# EAGLE board CT_schematic (EAGLE 7.6.0)

Size 100 x 80 mm. Coordinates in mm from the lower left corner, seen from the top.
Outline: 0,0 100,0 100,80 0,80 0,0
Copper layers (1*16): Top 0.035mm / dielectric 1.5mm / Bottom 0.035mm
Design rules "default": minimum track width 10mil, minimum drill 24mil, track to track 8mil, track to pad 8mil, pad to pad 8mil, via to via 8mil, smd to smd 8mil, copper to edge 40mil, drill to drill 8mil, minimum pad ring 10mil, minimum via ring 8mil, stop-mask expansion 4mil, vias tented up to drill 0mil, thermal gap 10mil

## Footprints (pad centres in the part's own frame; a part is rotated, then mirrored left to right if it is on the bottom)
C0603 = smd 0.8 x 0.8: 1 -0.762,0; 2 0.762,0
C0402 = smd 0.5 x 0.5: 1 -0.508,0; 2 0.508,0
R0603 = smd 0.8 x 0.8: 1 -0.762,0; 2 0.762,0
C1206 = smd 1.3 x 1.6: 1 -1.524,0; 2 1.524,0
C0805 = smd 1.2 x 1.3: 1 -1.016,0; 2 1.016,0
C1210 = smd 1.2 x 2.5: 1 -1.524,0; 2 1.524,0
EXV-9H = smd 3.505 x 1.676: 1 -2.857,0; 2 2.857,0
L0603 = smd 0.8 x 0.8: 1 -0.762,0; 2 0.762,0
PJ-037B_PACKAGE = drill 3.7 square: 1 12,0 | drill 3.2 square: 2 6,0
LQFP64 = smd 0.3 x 1.2: 1 -3.75,-5.75; 2 -3.25,-5.75; 3 -2.75,-5.75; 4 -2.25,-5.75; 5 -1.75,-5.75; 6 -1.25,-5.75; 7 -0.75,-5.75; 8 -0.25,-5.75; 9 0.25,-5.75; 10 0.75,-5.75; 11 1.25,-5.75; 12 1.75,-5.75; 13 2.25,-5.75; 14 2.75,-5.75; 15 3.25,-5.75; 16 3.75,-5.75; 33 3.75,5.75; 34 3.25,5.75; 35 2.75,5.75; 36 2.25,5.75; 37 1.75,5.75; 38 1.25,5.75; 39 0.75,5.75; 40 0.25,5.75; 41 -0.25,5.75; 42 -0.75,5.75; 43 -1.25,5.75; 44 -1.75,5.75; 45 -2.25,5.75; 46 -2.75,5.75; 47 -3.25,5.75; 48 -3.75,5.75 | smd 1.2 x 0.3: 17 5.75,-3.75; 18 5.75,-3.25; 19 5.75,-2.75; 20 5.75,-2.25; 21 5.75,-1.75; 22 5.75,-1.25; 23 5.75,-0.75; 24 5.75,-0.25; 25 5.75,0.25; 26 5.75,0.75; 27 5.75,1.25; 28 5.75,1.75; 29 5.75,2.25; 30 5.75,2.75; 31 5.75,3.25; 32 5.75,3.75; 49 -5.75,3.75; 50 -5.75,3.25; 51 -5.75,2.75; 52 -5.75,2.25; 53 -5.75,1.75; 54 -5.75,1.25; 55 -5.75,0.75; 56 -5.75,0.25; 57 -5.75,-0.25; 58 -5.75,-0.75; 59 -5.75,-1.25; 60 -5.75,-1.75; 61 -5.75,-2.25; 62 -5.75,-2.75; 63 -5.75,-3.25; 64 -5.75,-3.75
TDFN-8/6MM = smd 0.3 x 0.75: 1 0,0; 2 0.5,0; 3 1,0; 4 1.5,0; 5 1.5,3; 6 1,3; 7 0.5,3; 8 0,3
SOIC-8 = smd 1.6 x 0.6: 1 -2.7,1.905 | smd 1.55 x 0.6: 2 -2.7,0.635; 3 -2.7,-0.635; 4 -2.7,-1.905; 5 2.7,-1.905; 6 2.7,-0.635; 7 2.7,0.635; 8 2.7,1.905
182-009-MALE = drill 1.194 pad 1.524 octagon: 1 -5.537,10.923; 2 -2.769,10.923; 3 0,10.923; 4 2.769,10.923; 5 5.537,10.923; 6 -4.153,8.08; 7 -1.384,8.08; 8 1.384,8.08; 9 4.153,8.08 | hole 3.048: -12.446,9.501; 12.446,9.501
QFN-32 = smd 0.6 x 0.3: 1 -2.3,1.75; 2 -2.3,1.25; 3 -2.3,0.75; 4 -2.3,0.25; 5 -2.3,-0.25; 6 -2.3,-0.75; 7 -2.3,-1.25; 8 -2.3,-1.75; 17 2.3,-1.75; 18 2.3,-1.25; 19 2.3,-0.75; 20 2.3,-0.25; 21 2.3,0.25; 22 2.3,0.75; 23 2.3,1.25; 24 2.3,1.75 | smd 0.3 x 0.6: 9 -1.75,-2.3; 10 -1.25,-2.3; 11 -0.75,-2.3; 12 -0.25,-2.3; 13 0.25,-2.3; 14 0.75,-2.3; 15 1.25,-2.3; 16 1.75,-2.3; 25 1.75,2.3; 26 1.25,2.3; 27 0.75,2.3; 28 0.25,2.3; 29 -0.25,2.3; 30 -0.75,2.3; 31 -1.25,2.3; 32 -1.75,2.3 | smd 3.2 x 3.2: EXP 0,0
SJ-43515TS-SMT-TR = smd 2.2 x 3: 1 0.6,-7.4; 4 3.4,-7.4 | smd 3 x 3: 2 12.8,-7.4; 5 17,-3 | smd 2 x 3: 3 5.3,0; 6 2.5,0 | drill 1.8: P$7 4.5,-3.69; P$8 11.54,-3.69
WM-64PC = drill 0.6 pad 1: 1 -1,0.95; 2 -1,-0.95
RHB32_3P45X3P45 = smd 0.85 x 0.28: 1 -2.475,1.75; 2 -2.475,1.25; 3 -2.475,0.75; 4 -2.475,0.25; 5 -2.475,-0.25; 6 -2.475,-0.75; 7 -2.475,-1.25; 8 -2.475,-1.75; 17 2.475,-1.75; 18 2.475,-1.25; 19 2.475,-0.75; 20 2.475,-0.25; 21 2.475,0.25; 22 2.475,0.75; 23 2.475,1.25; 24 2.475,1.75 | smd 0.28 x 0.85: 9 -1.75,-2.475; 10 -1.25,-2.475; 11 -0.75,-2.475; 12 -0.25,-2.475; 13 0.25,-2.475; 14 0.75,-2.475; 15 1.25,-2.475; 16 1.75,-2.475; 25 1.75,2.475; 26 1.25,2.475; 27 0.75,2.475; 28 0.25,2.475; 29 -0.25,2.475; 30 -0.75,2.475; 31 -1.25,2.475; 32 -1.75,2.475 | smd 3.45 x 3.45: 33 0,0
USB-A-H = drill 0.914: 1 2.718,3.493; 2 2.718,1.003; 3 2.718,-1.003; 4 2.718,-3.493 | drill 2.311: 5 0,-6.566; 6 0,6.566
SOT143B = smd 1 x 0.7: 1 -0.75,-1 | smd 0.6 x 0.7: 2 0.95,-1; 3 0.95,1; 4 -0.95,1
SOT-23-6 = smd 1.1 x 0.6: 1 -1.4,0.95; 2 -1.4,0; 3 -1.4,-0.95; 4 1.4,-0.95; 5 1.4,0; 6 1.4,0.95
ABS07-32.768KHZ-7-T = smd 1.1 x 2.4: 1 -2.5,0; 2 0,0
ABLS-25.000MHZ-B2F-T = smd 5.6 x 2.8: 1 -3.81,0; 2 5.69,0
ASFL1 = smd 1.7 x 1.5: 1 -1.27,-1.1; 2 1.27,-1.1; 3 1.27,1.1; 4 -1.27,1.1
WSON-8 = smd 0.3 x 0.6: 1 -0.75,0; 2 0.05,0; 3 0.85,0; 4 1.65,0; 5 1.65,3.8; 6 0.85,3.8; 7 0.05,3.8; 8 -0.75,3.8 | smd 3 x 2.6: PAD 0.45,1.9
SON-6 = smd 0.55 x 0.3: 1 -0.355,0.5 | smd 0.52 x 0.3: 2 -0.37,0; 3 -0.37,-0.5; 4 0.37,-0.5; 5 0.37,0; 6 0.37,0.5
SW_4-1437565-2 = smd 1.4 x 2.1: 1 -2.23,4.55; 2 -2.23,-4.55; 3 2.23,4.55; 4 2.23,-4.55
LGM67K-G1J2-24-Z = smd 0.8 x 1.4: A -2,0; C 0,0
NC7SZ125M5X = smd 1.3 x 0.7: 1 -1.3,0.95; 2 -1.3,0; 3 -1.3,-0.95; 4 1.3,-0.95; 5 1.3,0.95

## Placement (x,y rotation side)
C1  1e-06  [C0603]  -19.05,93.98 0 top  (outside the outline)
C2  1e-07  [C0603]  -22.86,93.98 0 top  (outside the outline)
C3  1e-07  [C0603]  -26.67,93.98 0 top  (outside the outline)
C4  1e-07  [C0603]  -30.48,93.98 0 top  (outside the outline)
C5  1e-07  [C0603]  -34.29,93.98 0 top  (outside the outline)
C6  1e-07  [C0603]  -38.1,93.98 0 top  (outside the outline)
C7  4.7e-06  [C0603]  -80.01,88.9 0 top  (outside the outline)
C8  2.2e-06  [C0603]  -83.82,88.9 0 top  (outside the outline)
C9  2.2e-06  [C0603]  -87.63,88.9 0 top  (outside the outline)
C10  1e-08  [C0603]  -41.91,93.98 0 top  (outside the outline)
C11  1e-06  [C0603]  -45.72,93.98 0 top  (outside the outline)
C12  1e-11  [C0402]  -64.77,99.06 0 top  (outside the outline)
C13  1e-11  [C0402]  -68.58,99.06 0 top  (outside the outline)
C14  1e-11  [C0402]  -72.39,99.06 0 top  (outside the outline)
C15  1e-11  [C0402]  -76.2,99.06 0 top  (outside the outline)
C16  1e-08  [C0402]  -80.01,99.06 0 top  (outside the outline)
C17  1e-06  [C0603]  -49.53,93.98 0 top  (outside the outline)
C18  1e-06  [C0603]  -53.34,93.98 0 top  (outside the outline)
C19  1e-06  [C0603]  -57.15,93.98 0 top  (outside the outline)
C20  1e-06  [C0603]  -60.96,93.98 0 top  (outside the outline)
C21  1e-06  [C0603]  -64.77,93.98 0 top  (outside the outline)
C22  1e-06  [C0603]  -68.58,93.98 0 top  (outside the outline)
C23  1e-06  [C0603]  -72.39,93.98 0 top  (outside the outline)
C24  1e-06  [C0603]  -76.2,93.98 0 top  (outside the outline)
C25  1e-06  [C0603]  -80.01,93.98 0 top  (outside the outline)
C26  1e-07  [C0402]  -83.82,99.06 0 top  (outside the outline)
C27  1e-07  [C0402]  -87.63,99.06 0 top  (outside the outline)
C28  1e-07  [C0402]  -91.44,99.06 0 top  (outside the outline)
C29  1e-07  [C0402]  -15.24,104.14 0 top  (outside the outline)
C30  1e-06  [C0603]  -83.82,93.98 0 top  (outside the outline)
C31  1e-07  [C0402]  -19.05,104.14 0 top  (outside the outline)
C32  2.2e-06  [C0603]  -91.44,88.9 0 top  (outside the outline)
C33  1e-07  [C0402]  -22.86,104.14 0 top  (outside the outline)
C34  1e-07  [C0402]  -26.67,104.14 0 top  (outside the outline)
C35  2.2e-06  [C0603]  -15.24,93.98 0 top  (outside the outline)
C36  0.0001  [R0603]  -87.63,93.98 0 top  (outside the outline)
C37  1e-08  [C0402]  -30.48,104.14 0 top  (outside the outline)
C38  1e-08  [C0402]  -34.29,104.14 0 top  (outside the outline)
C39  1e-08  [C0402]  -38.1,104.14 0 top  (outside the outline)
C40  1e-05  [C1206]  -41.91,81.28 0 top  (outside the outline)
C41  1e-05  [C0805]  -72.39,81.28 0 top  (outside the outline)
C42  1e-06  [C0603]  -91.44,93.98 0 top  (outside the outline)
C43  1e-05  [C1210]  -29.21,82.55 0 top  (outside the outline)
C44  1e-08  [C0402]  -41.91,104.14 0 top  (outside the outline)
C45  1e-05  [C1206]  -48.26,81.28 0 top  (outside the outline)
C46  1e-05  [C1210]  -35.56,82.55 0 top  (outside the outline)
C47  1e-07  [C0402]  -45.72,104.14 0 top  (outside the outline)
C48  0.0001  [EXV-9H]  -17.78,74.93 0 top  (outside the outline)
C49  0.0001  [EXV-9H]  -29.21,74.93 0 top  (outside the outline)
C50  1e-08  [C0402]  -49.53,104.14 0 top  (outside the outline)
C51  1e-08  [C0402]  -53.34,104.14 0 top  (outside the outline)
F1  240.0  [L0603]  -15.24,99.06 0 top  (outside the outline)
J1  PJ-037B  [PJ-037B_PACKAGE]  -55.88,43.18 0 top  (outside the outline)
R2  1000.0  [R0603]  -19.05,99.06 0 top  (outside the outline)
R4  4700.0  [R0603]  -22.86,99.06 0 top  (outside the outline)
R5  4700.0  [R0603]  -26.67,99.06 0 top  (outside the outline)
R6  2200.0  [R0603]  -30.48,99.06 0 top  (outside the outline)
R7  2200.0  [R0603]  -34.29,99.06 0 top  (outside the outline)
R8  10000.0  [R0603]  -30.48,88.9 0 top  (outside the outline)
R9  10000.0  [R0603]  -35.56,88.9 0 top  (outside the outline)
R10  10000.0  [R0603]  -40.64,88.9 0 top  (outside the outline)
R11  10000.0  [R0603]  -45.72,88.9 0 top  (outside the outline)
R12  120.0  [R0603]  -38.1,99.06 0 top  (outside the outline)
R13  1270.0  [R0603]  -41.91,99.06 0 top  (outside the outline)
R14  1270.0  [R0603]  -45.72,99.06 0 top  (outside the outline)
R15  47000.0  [R0603]  -50.8,88.9 0 top  (outside the outline)
R16  10000.0  [R0603]  -55.88,88.9 0 top  (outside the outline)
R17  10000.0  [R0603]  -60.96,88.9 0 top  (outside the outline)
R18  100000.0  [R0603]  -82.55,81.28 0 top  (outside the outline)
R19  806.0  [R0603]  -49.53,99.06 0 top  (outside the outline)
R20  1000.0  [R0603]  -53.34,99.06 0 top  (outside the outline)
R21  100000.0  [R0603]  -87.63,81.28 0 top  (outside the outline)
R22  153694.38  [R0603]  -77.47,81.28 0 top  (outside the outline)
R23  100000.0  [R0603]  -92.71,81.28 0 top  (outside the outline)
R24  100000.0  [R0603]  -15.24,88.9 0 top  (outside the outline)
R25  3900.0  [R0603]  -57.15,99.06 0 top  (outside the outline)
R26  1000.0  [R0603]  -60.96,99.06 0 top  (outside the outline)
R27  10000.0  [R0603]  -66.04,88.9 0 top  (outside the outline)
R28  10000.0  [R0603]  -71.12,88.9 0 top  (outside the outline)
R29  82000.0  [R0603]  -76.2,88.9 0 top  (outside the outline)
R30  300000.0  [R0603]  -20.32,88.9 0 top  (outside the outline)
R31  120000.0  [R0603]  -25.4,88.9 0 top  (outside the outline)
U1  STM32F215RGT6  [LQFP64]  -68.58,43.18 0 top  (outside the outline)
U2  24AA64T-I/MNY  [TDFN-8/6MM]  -50.8,54.61 0 top  (outside the outline)
U3  MCP2562-E/SN  [SOIC-8]  -63.5,55.88 0 top  (outside the outline)
U4  182-009-113R531  [182-009-MALE]  -36.83,6.35 0 top  (outside the outline)
U5  SGTL5000XNAA3  [QFN-32]  -34.29,55.88 0 top  (outside the outline)
U6  SJ-43515TS-SMT-TR  [SJ-43515TS-SMT-TR]  -39.37,31.75 0 top  (outside the outline)
U7  SJ-43515TS-SMT-TR  [SJ-43515TS-SMT-TR]  -67.31,31.75 0 top  (outside the outline)
U8  SJ-43515TS-SMT-TR  [SJ-43515TS-SMT-TR]  -39.37,45.72 0 top  (outside the outline)
U9  WM-64PCT  [WM-64PC]  -20.32,55.88 0 top  (outside the outline)
U10  TUSB1210BRHBR  [RHB32_3P45X3P45]  -59.69,74.93 0 top  (outside the outline)
U11  61400416021  [USB-A-H]  -59.69,8.89 0 top  (outside the outline)
U12  prtr5v0u2ax  [SOT143B]  -66.04,104.14 0 top  (outside the outline)
U13  MAX4995AAUT+T  [SOT-23-6]  -54.61,81.28 0 top  (outside the outline)
U14  ABS07-32.768KHZ-7-T  [ABS07-32.768KHZ-7-T]  -80.01,74.93 0 top  (outside the outline)
U15  ABLS-25.000MHZ-B2F-T  [ABLS-25.000MHZ-B2F-T]  -48.26,74.93 0 top  (outside the outline)
U16  ASFL1-19.2MHZ-NCS  [ASFL1]  -66.04,66.04 0 top  (outside the outline)
U17  ASFL-24.57MHZ-NCS  [ASFL1]  -83.82,66.04 0 top  (outside the outline)
U18  LP3878SDX-ADJ/NOPB  [WSON-8]  -85.09,53.34 0 top  (outside the outline)
U19  LP2951ACSDX/NOPB  [WSON-8]  -48.26,63.5 0 top  (outside the outline)
U20  LP3878SDX-ADJ/NOPB  [WSON-8]  -30.48,63.5 0 top  (outside the outline)
U21  TPS3895ADRYR  [SON-6]  -69.85,102.87 0 top  (outside the outline)
U22  4-1437565-2  [SW_4-1437565-2]  -90.17,43.18 0 top  (outside the outline)
U23  Q65110A2395  [LGM67K-G1J2-24-Z]  -17.78,82.55 0 top  (outside the outline)
U24  nc7sz125m5x  [NC7SZ125M5X]  -59.69,81.28 0 top  (outside the outline)
U25  nc7sz125m5x  [NC7SZ125M5X]  -66.04,81.28 0 top  (outside the outline)

## Library data of the parts
C1-C51 F1 J1 R2 R4-R31 U1-U25 = circuit_tree

## Nets
CLK_CRYSTAL_U1_3: C12.1 U1.3 U14.1
CLK_CRYSTAL_U1_4: C13.1 U1.4 U14.2
CLK_CRYSTAL_U1_5: C14.1 U1.5 U15.1
CLK_CRYSTAL_U1_6: C15.1 U1.6 U15.2
CLK_U5_21: U5.21 U17.3
CLK_U10_1: U10.1 U16.3
GND: C1.2 C2.2 C3.2 C4.2 C5.2 C6.2 C7.2 C8.2 C9.2 C10.2 C11.2 C12.2 C13.2 C14.2 C15.2 C16.2 C17.2 C18.2 C26.2 C27.2 C28.2 C29.2 C30.2 C31.2 C32.2 C33.2 C34.2 C35.2 C36.2 C37.2 C38.2 C39.2 C40.2 C41.2 C42.2 C43.2 C44.2 C45.2 C46.2 C47.2 C48.2 C49.2 C50.2 C51.2 J1.2 R2.2 R8.2 R9.2 R14.2 R15.2 R17.2 R20.2 R23.2 R26.2 R29.2 R31.2 U1.12 U1.18 U1.63 U2.4 U3.2 U3.8 U4.5 U5.1 U5.3 U5.7 U5.EXP U7.1 U8.1 U9.2 U10.23 U10.33 U11.4 U11.5 U11.6 U12.1 U13.2 U16.2 U17.2 U18.3 U18.PAD U19.3 U19.4 U19.PAD U20.3 U20.PAD U21.2 U23.C U24.1 U24.3 U25.1 U25.3
NET_U1_7: R4.1 U1.7 U24.4
NET_U1_13: C10.1 C11.1 F1.1 U1.13
NET_U1_31: C8.1 U1.31
NET_U1_47: C9.1 U1.47
NET_U1_58: R6.1 U1.58 U2.6
NET_U1_59: R7.1 U1.59 U2.5
NET_U1_60: R8.1 U1.60
NET_U1_61: U23.A
NET_U1_62: U22.3 U22.4
NET_U2_1: R9.1 U2.1
NET_U2_2: R10.1 U2.2
NET_U2_3: R11.1 U2.3
NET_U3_6: R12.2 U3.6
NET_U4_2: R12.2 U3.6 U4.2
NET_U4_3: R12.1 U3.7 U4.3
NET_U5_10: C29.1 U5.10
NET_U5_29: R13.1 U5.29
NET_U5_31: R14.1 U5.31
NET_U6_1: U5.4 U6.1
NET_U6_2: U5.2 U6.2
NET_U6_5: U5.6 U6.5
NET_U7_2: C20.1 U7.2
NET_U7_5: C19.1 U7.5
NET_U7_11: C20.2
NET_U7_12: C19.2
NET_U8_2: C22.1 C23.1 U8.2
NET_U8_5: C21.1 U8.5
NET_U8_13: C22.2 C23.2
NET_U8_14: C21.2
NET_U9_1: C24.1 C25.1 C30.1 U5.16 U9.1
NET_U9_15: C24.2 C25.2
NET_U10_11: R16.1 U10.11
NET_U10_12: C35.1 U10.12
NET_U10_14: R17.1 U10.14
NET_U10_20: C32.1 U10.20
NET_U10_27: R5.1 U10.27 U25.4
NET_U11_1: C36.1 U10.22 U11.1 U12.4 U13.1
NET_U11_2: U10.19 U11.2 U12.3
NET_U11_3: U10.18 U11.3 U12.2
NET_U13_3: R15.1 U13.3
NET_U13_4: U10.17 U13.4
NET_U18_1: C39.1 U18.1
NET_U18_6: R19.2 R20.1 U18.6
NET_U18_8: R18.1 U18.8
NET_U19_5: R21.1 U19.5
NET_U19_7: R22.2 R23.1 U19.7
NET_U20_1: C44.1 U20.1
NET_U20_6: R25.2 R26.1 U20.6
NET_U20_8: R24.1 U20.8
NET_U21_1: R28.1 R29.1 U21.1
NET_U21_3: R30.2 R31.1 U21.3
NET_U21_4: R27.1 U21.4 U24.2 U25.2
NET_U22_1: R2.1 U22.1 U22.2
PROC_CAN1_RX: U1.44 U3.4
PROC_CAN1_TX: U1.45 U3.1
PROC_I2S3_SCK: U1.51 U5.24
PROC_I2S3_SD: U1.53 U5.26
PROC_I2S3_WS: U1.20 U5.23
PROC_USB_OTG_HS_ULPI_CK: U1.21 U10.26
PROC_USB_OTG_HS_ULPI_D0: U1.17 U10.3
PROC_USB_OTG_HS_ULPI_D1: U1.26 U10.4
PROC_USB_OTG_HS_ULPI_D2: U1.27 U10.5
PROC_USB_OTG_HS_ULPI_D3: U1.29 U10.6
PROC_USB_OTG_HS_ULPI_D4: U1.30 U10.7
PROC_USB_OTG_HS_ULPI_D5: U1.33 U10.9
PROC_USB_OTG_HS_ULPI_D6: U1.34 U10.10
PROC_USB_OTG_HS_ULPI_D7: U1.57 U10.13
PROC_USB_OTG_HS_ULPI_DIR: U1.10 U10.31
PROC_USB_OTG_HS_ULPI_NXT: U1.11 U10.2
PROC_USB_OTG_HS_ULPI_STP: U1.8 U10.29
VCC_S1_8V1: C40.1 C42.1 C45.1 C48.1 C49.1 J1.1 R18.2 R24.2 U18.4 U19.8 U20.4
VCC_TIER1_1V8: C1.1 C2.1 C3.1 C4.1 C5.1 C6.1 C7.1 C16.1 C18.1 C26.1 C27.1 C28.1 C33.1 C34.1 C41.1 C47.1 C50.1 C51.1 F1.2 R4.2 R5.2 R6.2 R7.2 R10.2 R11.2 R13.2 R16.2 R19.1 R27.2 R28.2 R30.1 U1.1 U1.19 U1.32 U1.48 U1.64 U2.7 U2.8 U3.5 U5.5 U5.20 U5.30 U10.28 U10.30 U10.32 U18.5 U21.6 U24.5 U25.5
VCC_TIER1_3V3: C31.1 C37.1 C38.1 C43.1 R21.2 R22.1 U10.21 U16.4 U17.4 U19.1
VCC_TIER1_5V0: C17.1 C46.1 R25.1 U3.3 U13.5 U20.5

## Tracks (layer width: path | path; a pad name or v marks a point on that pad's centre or on a via)
CLK_CRYSTAL_U1_3  (2 unrouted)
CLK_CRYSTAL_U1_4  (2 unrouted)
CLK_CRYSTAL_U1_5  (2 unrouted)
CLK_CRYSTAL_U1_6  (2 unrouted)
CLK_U5_21  (1 unrouted)
CLK_U10_1  (1 unrouted)
GND  (91 unrouted)
NET_U1_7  (2 unrouted)
NET_U1_13  (3 unrouted)
NET_U1_31  (1 unrouted)
NET_U1_47  (1 unrouted)
NET_U1_58  (2 unrouted)
NET_U1_59  (2 unrouted)
NET_U1_60  (1 unrouted)
NET_U1_62  (1 unrouted)
NET_U2_1  (1 unrouted)
NET_U2_2  (1 unrouted)
NET_U2_3  (1 unrouted)
NET_U3_6  (1 unrouted)
NET_U4_2  (2 unrouted)
NET_U4_3  (2 unrouted)
NET_U5_10  (1 unrouted)
NET_U5_29  (1 unrouted)
NET_U5_31  (1 unrouted)
NET_U6_1  (1 unrouted)
NET_U6_2  (1 unrouted)
NET_U6_5  (1 unrouted)
NET_U7_2  (1 unrouted)
NET_U7_5  (1 unrouted)
NET_U8_2  (2 unrouted)
NET_U8_5  (1 unrouted)
NET_U8_13  (1 unrouted)
NET_U9_1  (4 unrouted)
NET_U9_15  (1 unrouted)
NET_U10_11  (1 unrouted)
NET_U10_12  (1 unrouted)
NET_U10_14  (1 unrouted)
NET_U10_20  (1 unrouted)
NET_U10_27  (2 unrouted)
NET_U11_1  (4 unrouted)
NET_U11_2  (2 unrouted)
NET_U11_3  (2 unrouted)
NET_U13_3  (1 unrouted)
NET_U13_4  (1 unrouted)
NET_U18_1  (1 unrouted)
NET_U18_6  (2 unrouted)
NET_U18_8  (1 unrouted)
NET_U19_5  (1 unrouted)
NET_U19_7  (2 unrouted)
NET_U20_1  (1 unrouted)
NET_U20_6  (2 unrouted)
NET_U20_8  (1 unrouted)
NET_U21_1  (2 unrouted)
NET_U21_3  (2 unrouted)
NET_U21_4  (3 unrouted)
NET_U22_1  (2 unrouted)
PROC_CAN1_RX  (1 unrouted)
PROC_CAN1_TX  (1 unrouted)
PROC_I2S3_SCK  (1 unrouted)
PROC_I2S3_SD  (1 unrouted)
PROC_I2S3_WS  (1 unrouted)
PROC_USB_OTG_HS_ULPI_CK  (1 unrouted)
PROC_USB_OTG_HS_ULPI_D0  (1 unrouted)
PROC_USB_OTG_HS_ULPI_D1  (1 unrouted)
PROC_USB_OTG_HS_ULPI_D2  (1 unrouted)
PROC_USB_OTG_HS_ULPI_D3  (1 unrouted)
PROC_USB_OTG_HS_ULPI_D4  (1 unrouted)
PROC_USB_OTG_HS_ULPI_D5  (1 unrouted)
PROC_USB_OTG_HS_ULPI_D6  (1 unrouted)
PROC_USB_OTG_HS_ULPI_D7  (1 unrouted)
PROC_USB_OTG_HS_ULPI_DIR  (1 unrouted)
PROC_USB_OTG_HS_ULPI_NXT  (1 unrouted)
PROC_USB_OTG_HS_ULPI_STP  (1 unrouted)
VCC_S1_8V1  (10 unrouted)
VCC_TIER1_1V8  (48 unrouted)
VCC_TIER1_3V3  (9 unrouted)
VCC_TIER1_5V0  (5 unrouted)